# Altium PCB Weather Station.PcbDoc
Units mm, origin at the board's own origin, x right, y up, seen from the top; angles counter-clockwise.
Board outline 152.4 x 101.6 mm, 2 copper layers (Top Layer, Bottom Layer); 17 components, 6 nets, 98 pads, 0 vias.
Unrouted connection lines stored in the file: 21.
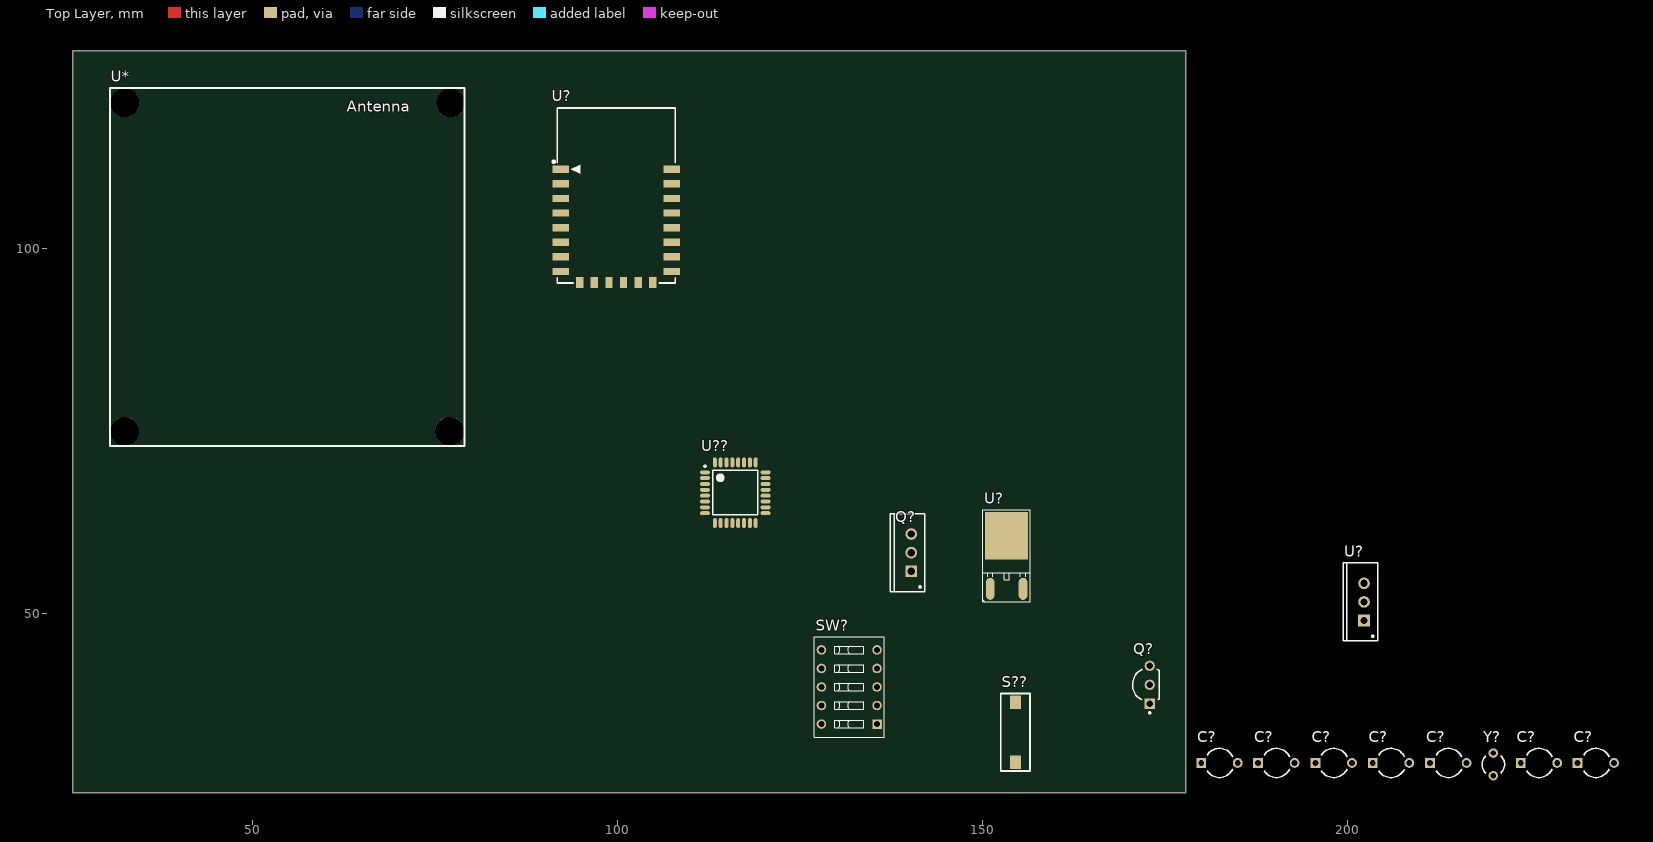
[diagram p0: Top Layer view]
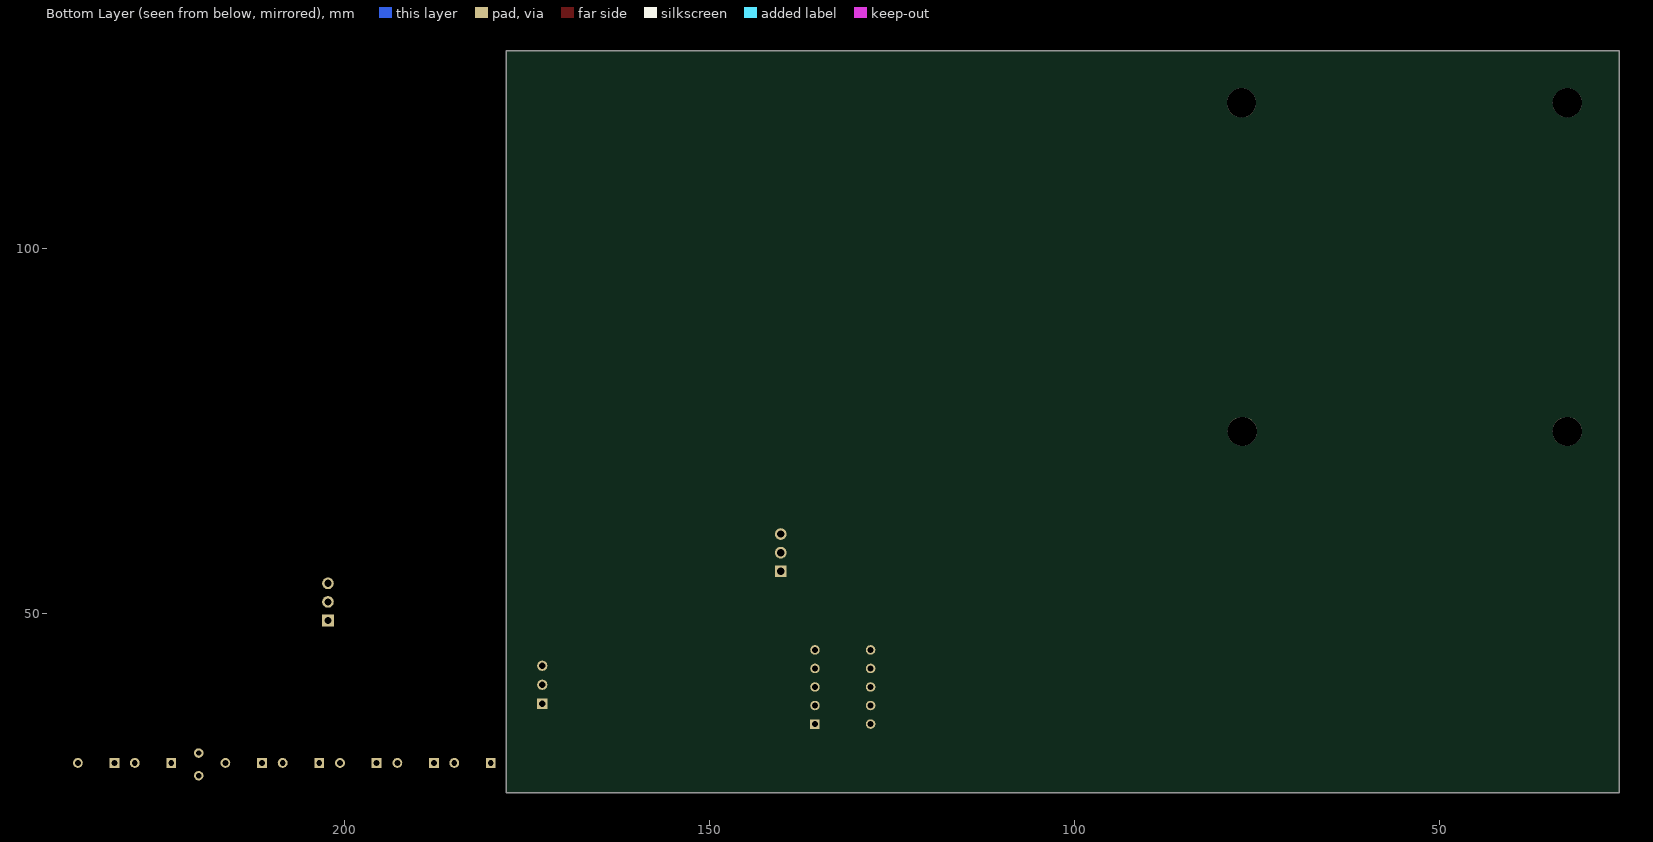
[diagram p1: Bottom Layer view, seen from below]

## Layer stack, top to bottom
Top Solder: solder mask 0.0102, Solder Resist, Dk 3.5
Top Layer: signal copper 0.0356
Dielectric 1: dielectric 0.32, FR-4, Dk 4.8
Bottom Layer: signal copper 0.0356
Bottom Solder: solder mask 0.0102, Solder Resist, Dk 3.5

## Board outline
25.4,25.4 177.8,25.4 177.8,127 25.4,127

## Design rules (kind name [scope] priority, off if disabled: settings)
Clearance [All] p1: gap=0.254
PolygonConnect [All] p1: connectstyle=Relief reliefconductorwidth=0.254 reliefentries=4 polygonreliefangle="90 Angle" airgapwidth=0.254
RoomDefinition Weathe_Station [InComponentClass('Weathe_Station')] p1: confinementstyle=ConfineIn formatcopy=TRUE lockcomponents=FALSE outline 178.943,26.924 188.595,26.924 188.595,65.786 178.943,65.786
RoutingVias [All] p1: holewidth=0.711 width=1.27 viastyle="Through Hole" minholewidth=0.711 minwidth=1.27 maxholewidth=0.711 maxwidth=1.27
SolderMaskExpansion [All] p1: expansion=0.102
UnpouredPolygon [All] p1: allowunpoured=FALSE
Width [All] p1: maxlimit=0.254 minlimit=0.254 preferedwidth=0.254
29 further rules are at their usual default settings.

## Classes and differential pairs
component class Weathe_Station: C? Q? S?? SW? U* U? U?? Y?

## Components (designator, comment, footprint, x,y, rotation, side; value= is the part's Value field where it differs from the comment)
C? "Cap2" CAPR5-4X5 226.15,29.5 r0 top
C? "Cap2" CAPR5-4X5 233.95,29.5 r0 top
C? "Cap2" CAPR5-4X5 205.9,29.5 r0 top
C? "Cap2" CAPR5-4X5 213.75,29.5 r0 top
C? "Cap2" CAPR5-4X5 190.2,29.5 r0 top
C? "Cap2" CAPR5-4X5 198.05,29.5 r0 top
C? "Cap2" CAPR5-4X5 182.4,29.5 r0 top
Q? "PMOS-2" TO-220AB 140.2,58.3 r90 top
Q? "BC639-16ZL1G" ONSC-TO-92-3-29-11_AM_BL 172.85,40.2 r90 top
S?? "SW-PB" "SMD push button 10x4" 154.45,28.7 r0 top
SW? "418117170905" 418117170905 131.7,39.9 r90 top
U* "SIM900" SIM900 30.5,72.9 r0 top
U? "ESP_12_E" ESP_12_E 91.8,110.8 r0 top
U? "LM1117T-3.3" T03B 202.2,51.55 r90 top
U? "L7805" DPAK 151.003,53.34 r90 top
U?? "ATmega328P-AU" 32A_L 116.1,66.5 r0 top
Y? "XTAL" R38 219.9,29.3 r0 top

## Footprints (in the part's own frame and the unit in brackets; to place one, negate y for a bottom-side part, rotate by r counter-clockwise, add the part's x,y. Pads: shape width x height; smd on the part's side, far side on the other; paste and mask are expansions set on the pad)
32A_L [mm] "Thin QFP, 32-Leads, Body 7x7mm, Pitch 0.8mm, IPC High Density"
  oval 1.35x0.55 smd: 1(-4.15,2.8) 2(-4.15,2) 3(-4.15,1.2) 4(-4.15,0.4) 5(-4.15,-0.4) 6(-4.15,-1.2) 7(-4.15,-2) 8(-4.15,-2.8) 17(4.15,-2.8) 18(4.15,-2) 19(4.15,-1.2) 20(4.15,-0.4) 21(4.15,0.4) 22(4.15,1.2) 23(4.15,2) 24(4.15,2.8)
  oval 0.55x1.35 smd: 9(-2.8,-4.15) 10(-2,-4.15) 11(-1.2,-4.15) 12(-0.4,-4.15) 13(0.4,-4.15) 14(1.2,-4.15) 15(2,-4.15) 16(2.8,-4.15) 25(2.8,4.15) 26(2,4.15) 27(1.2,4.15) 28(0.4,4.15) 29(-0.4,4.15) 30(-1.2,4.15) 31(-2,4.15) 32(-2.8,4.15)
  silkscreen extent -4.27,-3.05 3.05,3.75, body extent -3.5,-3.5 3.5,3.5, height 1.2
418117170905 [mm] "05p, 2.54mm Pitch, Horizontal, Box Type, THT, flat Actuator, red, without Tape, Tube"
  rect 1.3x1.3 hole 0.8: 1(-5.08,-3.81)
  round 1.3 hole 0.8: 2(-2.54,-3.81) 3(0,-3.81) 4(2.54,-3.81) 5(5.08,-3.81) 6(5.08,3.81) 7(2.54,3.81) 8(0,3.81) 9(-2.54,3.81) 10(-5.08,3.81)
  silkscreen extent -6.85,-4.8 6.85,4.8, body extent -6.85,-4.8 6.85,4.8, height 5.2
CAPR5-4X5 [mm] "Capacitor; 2 Leads"
  rect 1.35x1.35 hole 0.8: 1(-2.5,0)
  round 1.35 hole 0.8: 2(2.5,0)
  silkscreen extent -1.69,-2 1.82,2
DPAK [mm]
  oval 3x1.2 smd: 1(0,0) 3(0,-4.5)
  rect 6.5x5.9 smd: 2(7.275,-2.25)
  silkscreen extent -1.78,-5.46 10.79,1.02, body extent -0.5,-5.48 9.44,1.06, height 2.41
ESP_12_E [mm] "ESP-12 Wi-Fi Module by AI-Thinker"
  rect 2.25x1 smd: 1(0.375,0) 2(0.375,-2) 3(0.375,-4) 4(0.375,-6) 5(0.375,-8) 6(0.375,-10) 7(0.375,-12) 8(0.375,-14) 15(15.625,-14) 16(15.625,-12) 17(15.625,-10) 18(15.625,-8) 19(15.625,-6) 20(15.625,-4) 21(15.625,-2) 22(15.625,0)
  rect 1x1.5 smd: 9(3,-15.5) 10(5,-15.5) 11(7,-15.5) 12(9,-15.5) 13(11,-15.5) 14(13,-15.5)
  silkscreen extent -0.7,-15.57 16.08,8.37, body extent 0,-15.49 16,8.51, height 2.75
ONSC-TO-92-3-29-11_AM_BL [mm] "TO, 3-Leads, Body Dia 4.7mm, Pitch 2.6mm"
  rect 1.4x1.4 hole 0.9: 1(-2.6,0)
  round 1.4 hole 0.9: 2(0,0) 3(2.6,0)
  silkscreen extent -3.97,-1.34 2.13,2.35, body extent -2.84,-1.34 2.84,2.36, height 8.92
R38 [mm] "Crystal, Thru-Hole; 2 Leads; Body 3.1 x 8.2 mm (Dia.xH)"
  round 1.3 hole 0.7: 1(0,1.55) 2(0,-1.55)
  silkscreen extent -1.55,-1.19 1.55,1.17
SIM900 [mm]
  round 4 hole 4: 6(2,47) 7(46.6,47) 8(46.5,2) 9(2,2)
  silkscreen extent 0,0 48.5,49
"SMD push button 10x4" [mm]
  rect 1.5x1.8 smd: 1(0,0.9) 2(0,9.1)
  silkscreen extent -2,-0.3 2,10.3
T03B [mm] "TO, Thru-Hole, Vertical, Heatsink Mounted; 3 In-Line Leads; Pitch 2.54 mm"
  rect 1.6x1.6 hole 1: 1(-2.54,0)
  round 1.6 hole 1: 2(0,0) 3(2.54,0)
  silkscreen extent -5.35,-1.85 5.35,2.85, body extent -5.4,-1.9 5.4,2.9, height 19.4
TO-220AB [mm] "TO, Thru-Hole, Vertical, Heatsink Mounted; 3 In-Line Leads; Pitch 2.54 mm"
  rect 1.6x1.6 hole 1: 1(-2.54,0)
  round 1.6 hole 1: 2(0,0) 3(2.54,0)
  silkscreen extent -5.35,-1.85 5.35,2.85, body extent -5.4,-1.9 5.4,2.9, height 19.3

## Part data
C? C? C? C? C? C? C?: "Capacitor"
Q?: "P-Channel Power MOSFET"
Q?: "High Current Transistor, NPN Silicon, 3-Pin TO-92, Pb-Free, Ammo Box"
S??: "Switch"
SW?: "2.54 mm Compact THT Dip Switch with Flat Actuator WS-DITV"
U?: "ESP-12 Wi-Fi Module by AI-Thinker"
U?: "800mA Low-Dropout Linear Regulator, 3-pin TO-220"
U?: library part L7805-DPAK, "LINEAR REGULATOR 5.0V"
U??: "8-bit AVR Microcontroller, 32KB Flash, 1KB EEPROM, 2KB SRAM, 32-pin TQFP, Industrial Grade (-40°C to 85°C)"
Y?: "Crystal Oscillator"

## Nets (pads, with @x,y where several pads share a name; then routed paths per layer and width w, separated by ;. In a path a pad name is that pad's centre, name@x,y a point inside that pad or via, vN(x,y) a via of type N, cw(c..) or ccw(c..) an arc to the next point about the centre after c; other vN are vias at no path point)
3.3V: C?.1@211.25,29.5 U?.2@202.2,51.55 U?.8 U??.4 U??.18
5V: C?.1@195.55,29.5 U?.3@155.503,53.34
12V_BAT: C?.1@187.7,29.5 C?.1@203.4,29.5 U?.1@151.003,53.34 U?.3@202.2,54.09
GND: C?.2 U?.1@202.2,49.01 U?.2@153.253,60.615 U??.5 U??.21
NetC?_1: C?.1@231.45,29.5 U??.8 Y?.1
NetS??_2: S??.2 U?.1@92.175,110.8
pads on no net: C?.1@179.9,29.5 C?.1@223.65,29.5 Q?.1 Q?.2 Q?.3 S??.1 SW?.1 SW?.2 SW?.3 SW?.4 SW?.5 SW?.6 SW?.7 SW?.8 SW?.9 SW?.10 U*.6 U*.7 U*.8 U*.9 U?.2@92.175,108.8 U?.3@92.175,106.8 U?.4 U?.5 U?.6 U?.7 U?.9 U?.10 U?.11 U?.12 U?.13 U?.14 U?.15 U?.16 U?.17 U?.18 U?.19 U?.20 U?.21 U?.22 U??.1 U??.2 U??.3 U??.6 U??.7 U??.9 U??.10 U??.11 U??.12 U??.13 U??.14 U??.15 U??.16 U??.17 U??.19 U??.20 U??.22 U??.23 U??.24 U??.25 U??.26 U??.27 U??.28 U??.29 U??.30 U??.31 U??.32 Y?.2

## Text inside footprints (layer, text, board x,y; h text height)
U*: Top Overlay "Antenna" at 62.9,118.7 h1.52
U?: Mechanical 13 "CUTOUT POLYGON" at 91.927,118.166 h0.25; Mechanical 13 "ANTENNA AREA" at 91.927,118.674 h0.25